# Altium PCB LedLampDriver_4_layer.PcbDoc
Units mm, origin at the board's own origin, x right, y up, seen from the top; angles counter-clockwise.
Board outline 20 x 15 mm, 4 copper layers (Top Layer, Layer 1, Layer 2, Bottom Layer), stack 0.608 mm thick; 26 components, 10 nets, 57 pads, 75 vias.
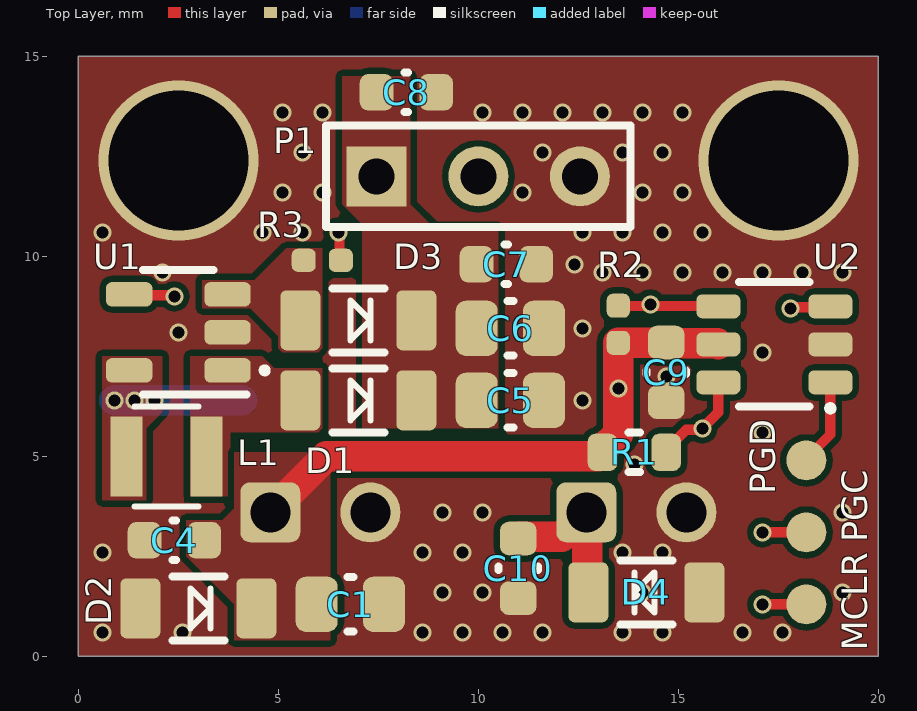
[diagram p0: Top Layer view]
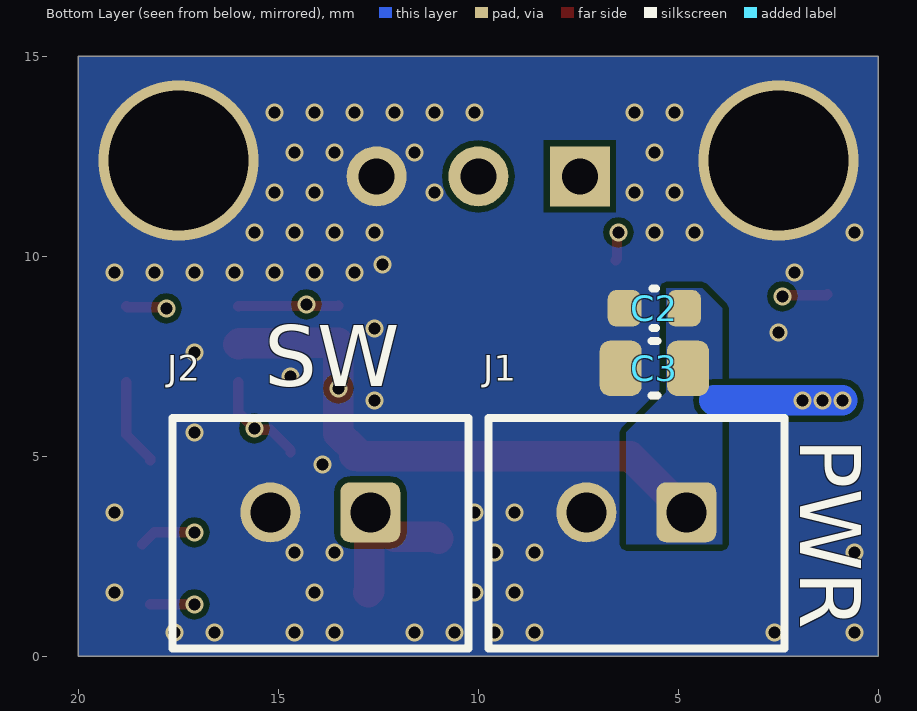
[diagram p1: Bottom Layer view, seen from below]
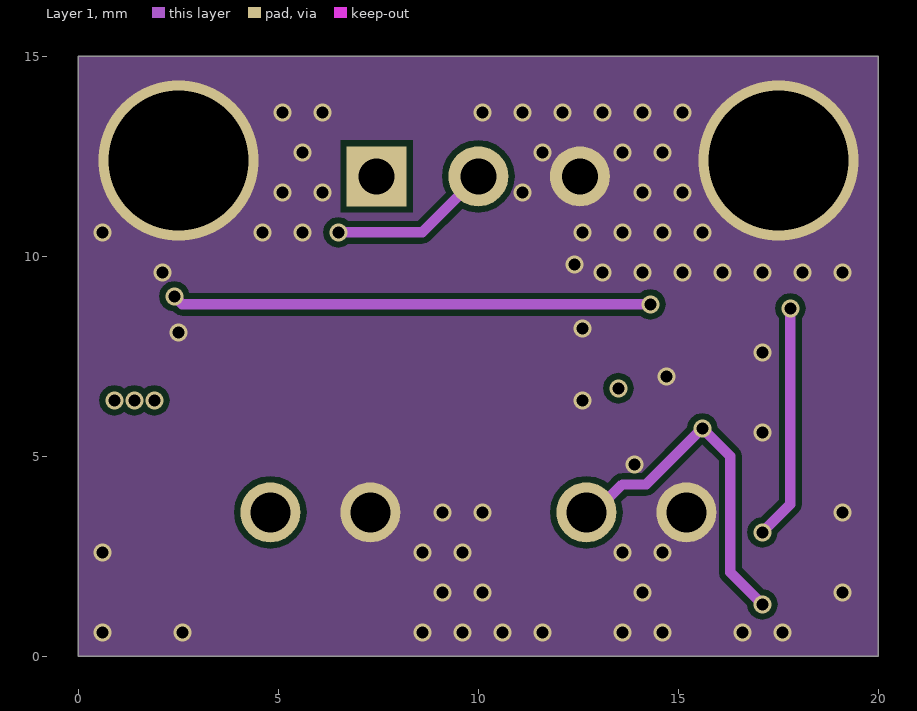
[diagram p2: Layer 1]
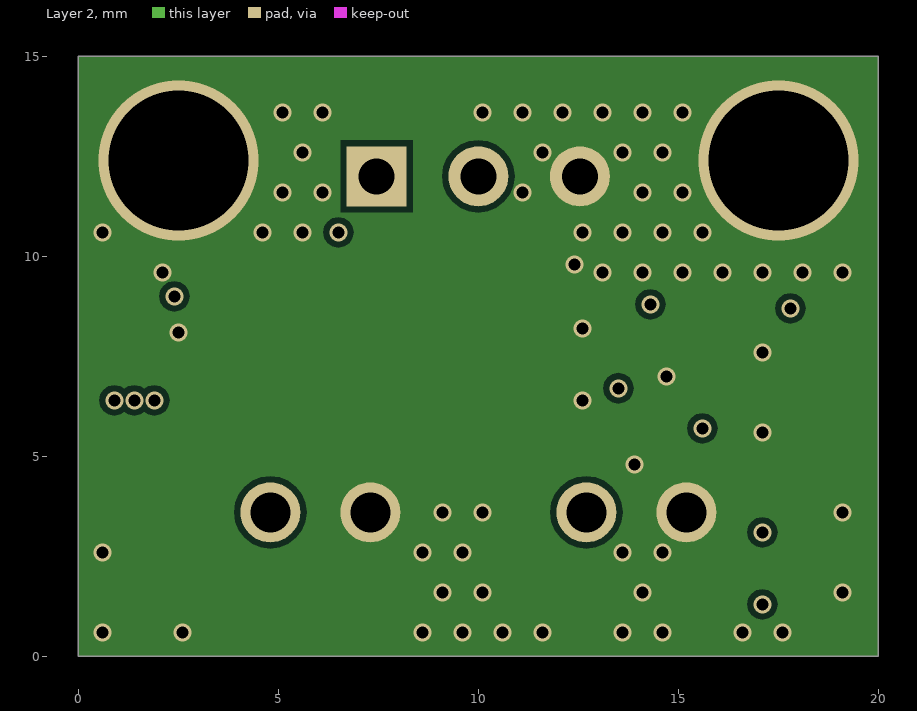
[diagram p3: Layer 2]
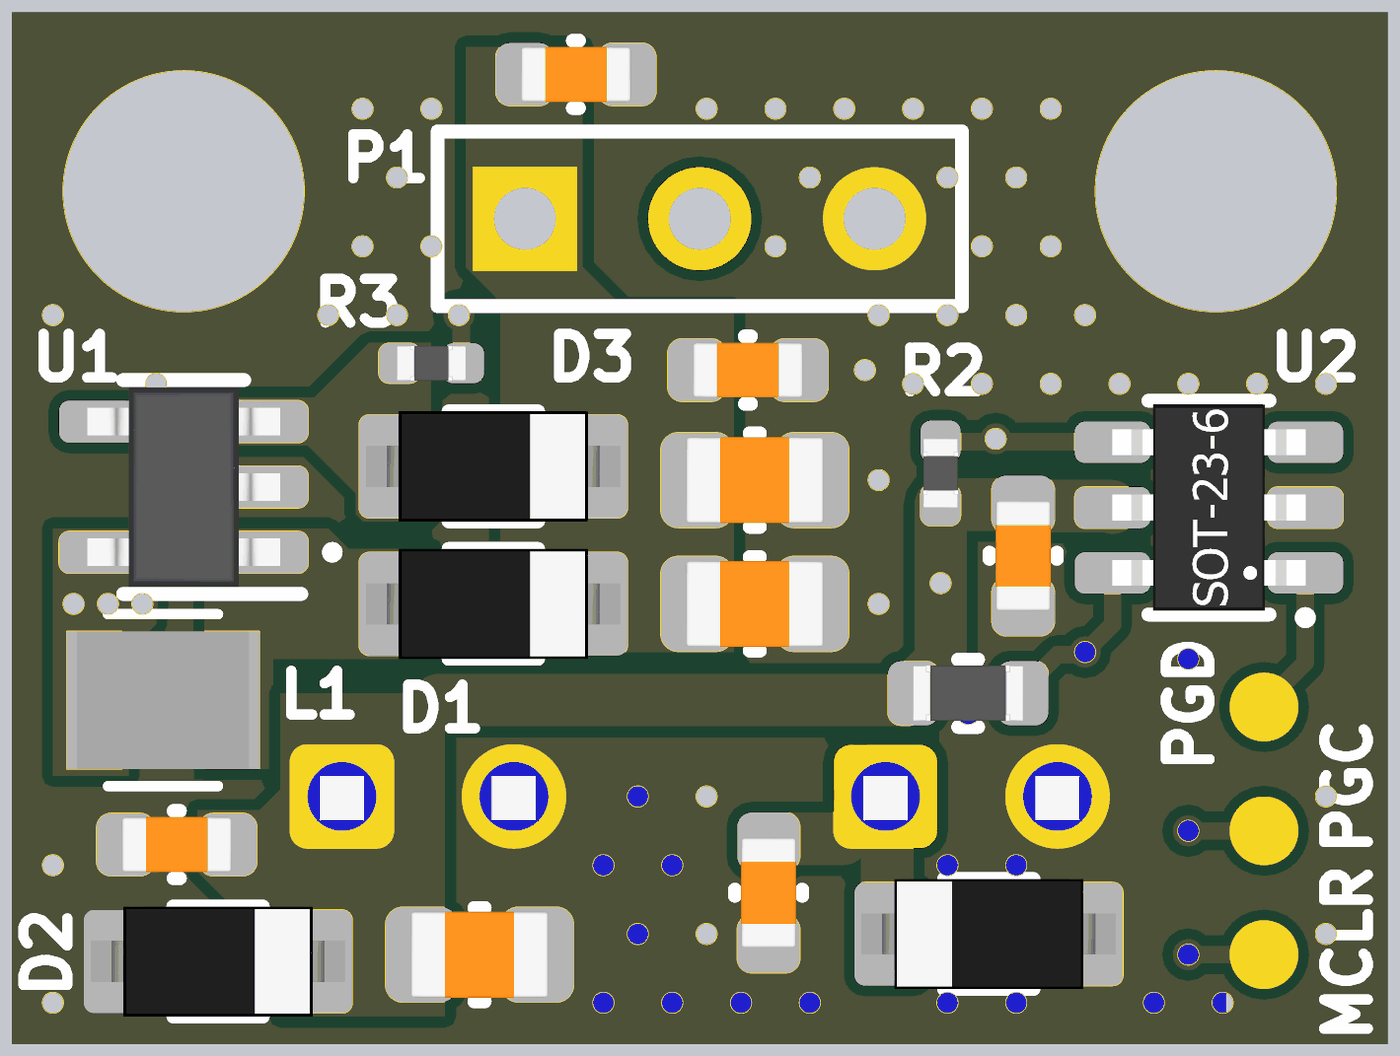
[diagram p4: 3D render of the assembled board from above, using the file's embedded part models]
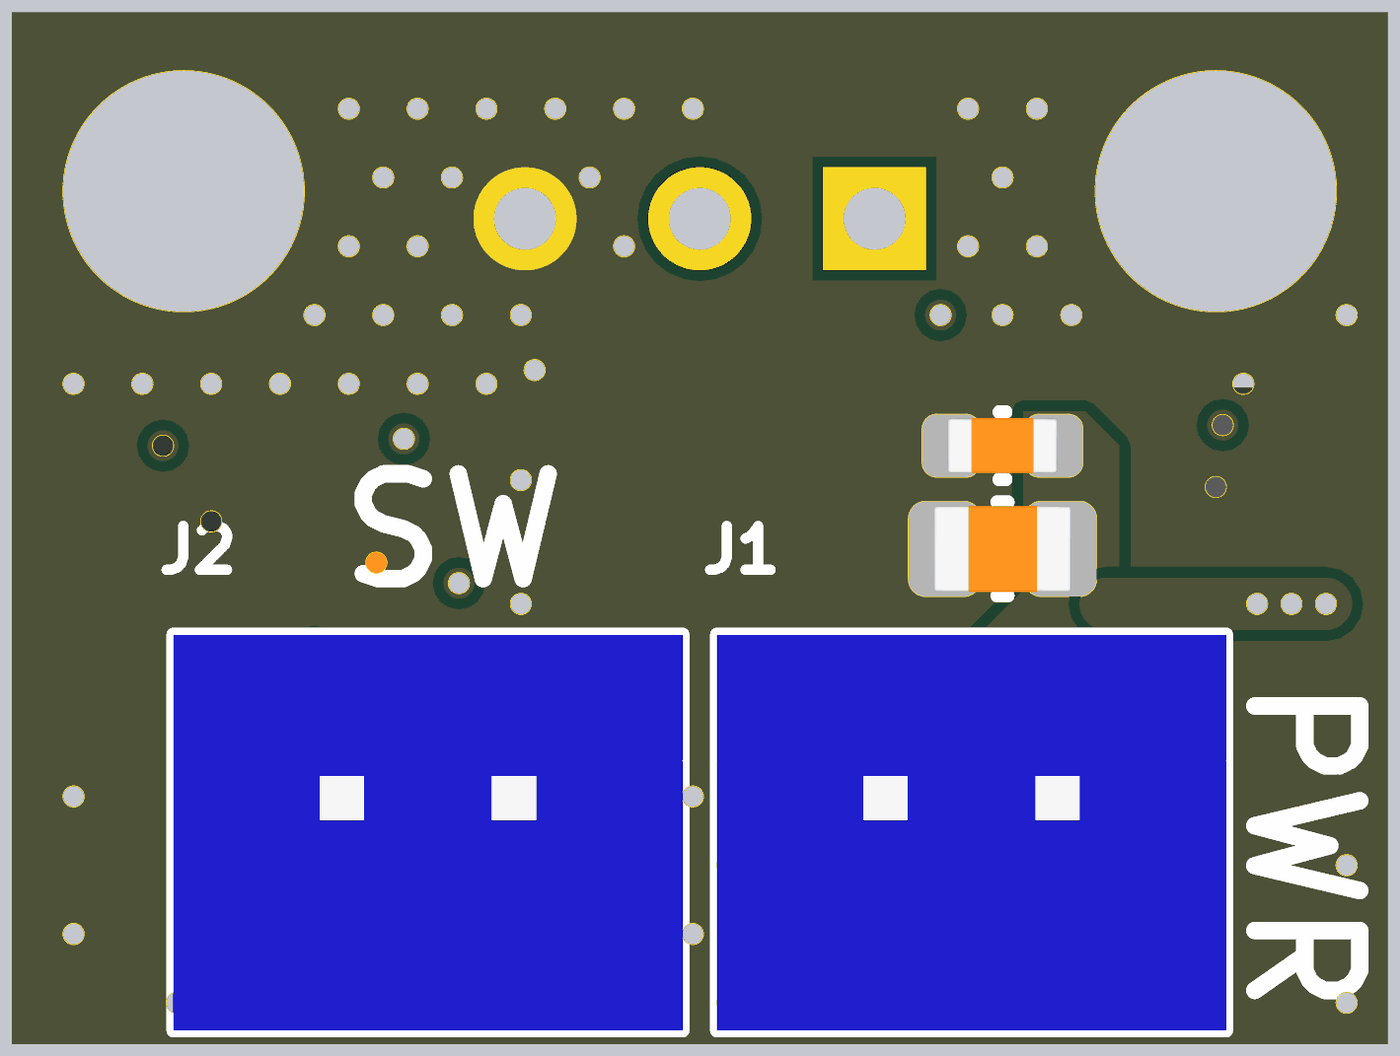
[diagram p5: 3D render of the assembled board from below, using the file's embedded part models]

## Layer stack, top to bottom
Top Solder: solder mask 0.0102, Solder Resist, Dk 3.5
Top Layer: signal copper 0.0356
Dielectric 2: prepreg 0.2, PP-006, Dk 4.1
Layer 1: signal copper 0.0178
Dielectric 1: core 0.1016, Core-009, Dk 4.5
Layer 2: signal copper 0.0178
Dielectric 3: prepreg 0.2, PP-006, Dk 4.1
Bottom Layer: signal copper 0.0356
Bottom Solder: solder mask 0.0102, Solder Resist, Dk 3.5

## Board outline
0,0 0,15 20,15 20,0

## Design rules (kind name [scope] priority, off if disabled: settings)
Clearance [All] p1: gap=0.15 ignorepadtopadclearanceinfootprint=FALSE except(0: Arc-Hole Track-Hole SMDPad-Hole THPad-Hole Via-Hole Fill-Hole Poly-Hole Region-Hole Text-Hole; 0.127: Arc-Arc Arc-Track Arc-SMDPad Track-Track Track-SMDPad SMDPad-SMDPad)
HoleSize [All] p1: absolutevalues=TRUE maxlimit=2.54 minlimit=0.3 maxpercent=80.000 minpercent=20.000
HoleToHoleClearance [All] p1: gap=0.127 allowstackedmicrovias=TRUE
MinimumSolderMaskSliver [All] p1: minsoldermaskwidth=0.127
PlaneConnect [All] p1: planeconnectstyle=Direct reliefexpansion=0.508 reliefentries=4 reliefconductorwidth=0.254 reliefairgap=0.254
PolygonConnect [All] p1: connectstyle=Direct reliefconductorwidth=0.254 reliefentries=4 polygonreliefangle="90 Angle" airgapwidth=0.254
RoutingVias [All] p1: holewidth=0.4 width=0.6 viastyle="Through Hole" minholewidth=0.3 minwidth=0.55 maxholewidth=1 maxwidth=0.1
SilkToSilkClearance [All] p1: silktosilkclearance=0.152
SilkToSolderMaskClearance [IsPad] p1: minsilkscreentomaskgap=0.152 clearancetoexposedcopper=TRUE
SolderMaskExpansion [All] p1: expansion=0.01 istentingtop=FALSE
Width [All] p1: maxlimit=3 minlimit=0.203 preferedwidth=0.254 midlayer1_minwidth=0.254 midlayer1_maxwidth=0.254 midlayer2_minwidth=0.254 midlayer2_maxwidth=0.254 bottomlayer_maxwidth=0.762 minimp=50.000000 maximp=50.000000 favimp=50.000000
24 further rules are at their usual default settings.

## Components (designator, comment, footprint, x,y, rotation, side; value= is the part's Value field where it differs from the comment)
C1 "10u" C0805_N 6.8,1.3 r0 top
C2 "10u" C0603_N#1 5.6,8.7 r0 bottom
C3 "100n" C0805_N 5.6,7.2 r0 bottom
C4 "100n" C0603_N#1 2.4,2.9 r180 top
C5 "10u" C0805_N 10.8,6.4 r0 top
C6 "10u" C0805_N 10.8,8.2 r0 top
C7 "1u" C0603_N#1 10.7,9.8 r0 top
C8 "100n" C0603_N#1 8.2,14.1 r0 top
C9 "100n" C0603_N#1 14.7,7.1 r270 top
C10 "100n" C0603_N#2 11,2.2 r270 top
D1 "DIODE" SOD-123#1 7,6.4 r180 top
D2 "DIODE_ZENER" SOD-123#2 3,1.2 r180 top
D3 "DIODE_ZENER" SOD-123#1 7,8.4 r180 top
D4 "DIODE_ZENER" SOD-123#1 14.2,1.6 r0 top
J1 "" B2B-XH-A 4.8,3.6 r0 bottom
J2 "" B2B-XH-A 12.7,3.6 r0 bottom
L1 "4,7u" IND_2520 2.2,5 r0 top
MCLR "TP" TP_1MM 18.2,1.3 r0 top
P1 "Header 3" HDR1X3 7.46,12 r0 top
PGC "TP" TP_1MM 18.2,3.1 r0 top
PGD "TP" TP_1MM 18.2,4.9 r0 top
R1 "10k" R0603_N 13.9,5.1 r0 top
R2 "DNP" R0402_N 13.5,8.3 r90 top
R3 "1k" R0402_N 6.1,9.9 r0 top
U1 "MIC2287C" SOT23-5 2.5,8.1 r90 top
U2 "PIC10F200" SOT23-6 17.4,7.8 r90 top

## Footprints (in the part's own frame and the unit in brackets; to place one, negate y for a bottom-side part, rotate by r counter-clockwise, add the part's x,y. Pads: shape width x height; smd on the part's side, far side on the other; paste and mask are expansions set on the pad)
B2B-XH-A [mm] "Header, Vertical, 2.50 mm pitch; 0.70 mm lead width, 5 pins, 1 row, 5 pins per row, 14.90 mm L X 5.75 mm W X 7.00 mm H body"
  rrect33% 1.5x1.5 / inner round 1.5 / far side rrect33% 1.5x1.5 hole 1 paste-1.5: 1(0,0)
  round 1.5 hole 1 paste-1.5: 2(2.5,0)
  silkscreen extent -2.45,-2.35 4.95,3.4, body extent -2.45,-2.35 4.95,3.4, height 7.05
C0603_N#1 [mm] "Capacitor, Chip; 1.60 mm L X 0.80 mm W X 0.87 mm H body"
  rrect50% 0.84x0.91 smd: 1(-0.745,0) 2(0.745,0)
  silkscreen extent -0.05,-0.49 0.05,0.49, body extent -0.8,-0.4 0.8,0.4, height 0.87
C0603_N#2 [mm] "Capacitor, Chip; 1.60 mm L X 0.80 mm W X 0.87 mm H body"
  rrect50% 0.84x0.91 smd: 1(-0.745,0)
  rrect50% 0.84x0.91 smd mask+0.01: 2(0.745,0)
  silkscreen extent -0.05,-0.49 0.05,0.49, body extent -0.8,-0.4 0.8,0.4, height 0.87
C0805_N [mm] "Capacitor, Chip; 2.00 mm L X 1.25 mm W X 1.35 mm H body"
  rrect48% 1.05x1.38 smd: 1(-0.84,0) 2(0.84,0)
  silkscreen extent -0.08,-0.68 0.08,0.68, body extent -1,-0.63 1,0.63, height 1.35
HDR1X3 [mm] "Connector; Header; 3 Position"
  rect 1.5x1.5 hole 0.9: 1(0,0)
  round 1.5 hole 0.9: 2(2.54,0)
  round 1.5 hole 0.9 mask+0: 3(5.08,0)
  silkscreen extent -1.27,-1.27 6.35,1.27
IND_2520 [mm] "2.5 mm x 2.0 mm"
  rect 0.8x2 smd: 1(-1,0) 2(1,0)
  silkscreen extent -0.8,-1.25 0.8,1.25, body extent -1.25,-1 1.25,1, height 1
R0402_N [mm] "Resistor, Chip; 1.00 mm L X 0.50 mm W X 0.40 mm H body"
  rrect52% 0.6x0.58 smd: 1(-0.465,0) 2(0.465,0)
  body extent -0.5,-0.25 0.5,0.25, height 0.4
R0603_N [mm] "Resistor, Chip; 1.60 mm L X 0.80 mm W X 0.55 mm H body"
  rrect51% 0.74x0.93 smd: 1(-0.795,0) 2(0.795,0)
  silkscreen extent -0.15,-0.49 0.15,0.49, body extent -0.8,-0.4 0.8,0.4, height 0.55
SOD-123#1 [mm] "SOD-123"
  rrect30% 1x1.5 smd: A(1.45,0) C(-1.45,0)
  silkscreen extent -0.65,-0.8 0.65,0.8, body extent -1.85,-0.8 1.85,0.8, height 1.27
SOD-123#2 [mm] "SOD-123"
  rrect30% 1x1.5 smd mask+0: A(1.45,0)
  rrect30% 1x1.5 smd: C(-1.45,0)
  silkscreen extent -0.65,-0.8 0.65,0.8, body extent -1.85,-0.8 1.85,0.8, height 1.27
SOT23-5 [mm] "Small Outline Transistor (SOT23), 0.95 mm pitch; 5 pin, 2.90 mm L X 1.60 mm W X 1.45 mm H body"
  rrect49% 0.61x1.16 smd: 1(-0.95,-1.23) 2(0,-1.23) 3(0.95,-1.23) 4(0.95,1.23) 5(-0.95,1.23)
  silkscreen extent -1.56,-2.24 1.56,0.88, body extent -1.45,-1.4 1.45,1.4, height 1.45
SOT23-6 [mm] "Small Outline Transistor (SOT23), 0.95 mm pitch; 6 pin"
  rrect49% 0.6x1.1 smd: 1(-0.95,-1.4) 2(0,-1.4) 3(0.95,-1.4) 4(0.95,1.4) 5(0,1.4) 6(-0.95,1.4)
  silkscreen extent -1.68,-1.48 1.56,0.88, body extent -1.5,-1.4 1.5,1.4, height 0.86
TP_1MM [mm]
  round 1 smd paste-100 mask+0: 1(0,0)

## Part data
C1 C2 C3 C4 C5 C6 C7 C8 C9 C10: library part CAP, RevS="$Rev:: 58        $"
J1 J2: library part PINHDR_2X1, "Socket", ComponentLink1Description=Manufacturer, ComponentLink1URL=http://www.we-online.de, ComponentLink2Description=Datasheet, ComponentLink2URL=http://katalog.we-online.de/em/datasheet/691412320002.pdf
L1: library part IND, "Inductor"
P1: "Header, 3-Pin", LatestRevisionDate=17-Jul-2002, LatestRevisionNote="Re-released for DXP Platform.", Publisher="Altium Limited"
R1 R2 R3: library part RES
U1: "1.2MHz PWM White LED Driver with OVP in / 2mm × 2mm MLF™ and Thin SOT-23"
U2: "6-Pin, 8-Bit Flash MCU"

## Via types
v1: diameter 0.45, hole 0.3, Top Layer to Bottom Layer, tented both sides, 73 vias
v2: diameter 4, hole 3.5, Top Layer to Bottom Layer, tented both sides, 2 vias

## Nets (pads, with @x,y where several pads share a name; then routed paths per layer and width w, separated by ;. In a path a pad name is that pad's centre, name@x,y a point inside that pad or via, vN(x,y) a via of type N, cw(c..) or ccw(c..) an arc to the next point about the centre after c; other vN are vias at no path point)
CTRL: R2.2 U1.4 U2.4 | length 15.6
  Top Layer w0.254: U1.4 1.295,9.025 2.375,9.025 v1(2.4,9) ; R2.2 13.508,8.758 15.993,8.758 U2.4
  Layer 1 w0.254: v1(2.4,9) 2.6,8.8 v1(14.3,8.8)
FB: P1.2 R3.2 | length 4.8
  Top Layer w0.254: v1(6.5,10.6) 6.533,10.567 6.533,9.932 R3.2
  Layer 1 w0.254: v1(6.5,10.6) 8.6,10.6 P1.2
GND: C1.2 C2.2 C3.2 C4.2 C5.2 C6.2 C7.2 C8.2 C9.2 C10.2 D2.A D4.A J1.2 J2.2 P1.3 U1.2 U2.2
  other v1: 0.6,0.6 2.6,0.6 8.6,0.6 9.6,0.6 10.6,0.6 11.6,0.6 13.6,0.6 14.6,0.6 16.6,0.6 17.6,0.6 9.1,1.6 10.1,1.6 14.1,1.6 19.1,1.6 0.6,2.6 8.6,2.6 9.6,2.6 13.6,2.6 14.6,2.6 9.1,3.6 10.1,3.6 19.1,3.6 13.9,4.8 17.1,5.6 12.6,6.4 14.7,7 17.1,7.6 2.5,8.1 12.6,8.2 2.1,9.6 13.1,9.6 14.1,9.6 15.1,9.6 16.1,9.6 17.1,9.6 18.1,9.6 19.1,9.6 12.4,9.8 0.6,10.6 4.6,10.6 5.6,10.6 12.6,10.6 13.6,10.6 14.6,10.6 15.6,10.6 5.1,11.6 6.1,11.6 11.1,11.6 14.1,11.6 15.1,11.6 5.6,12.6 11.6,12.6 13.6,12.6 14.6,12.6 5.1,13.6 6.1,13.6 10.1,13.6 11.1,13.6 12.1,13.6 13.1,13.6 14.1,13.6 15.1,13.6
  other v2: 2.5,12.4 17.5,12.4
NetD1_A: D1.A L1.2 U1.1
NetD3_A: D3.A R3.1 U1.3
NetPGC_1: PGC.1 U2.3 | length 8.3
  Top Layer w0.254: v1(17.1,3.1) 18.1,3.1 PGC.1@18.4,2.8 ; v1(17.8,8.7) 17.825,8.725 18.775,8.725 U2.3
  Layer 1 w0.254: v1(17.1,3.1) 17.8,3.8 v1(17.8,8.7)
NetPGD_1: PGD.1 U2.1 | length 2.2
  Top Layer w0.254: PGD.1 18.2,4.946 18.8,5.546 U2.1
SW: C10.1 D4.C J2.1 MCLR.1 R1.2 U2.6 | length 16.6
  Top Layer w0.254: J2.1 J2.1@12.882,3.782 ; R1.2 14.695,5.162 15.196,5.662 15.562,5.662 v1(15.6,5.7) 16,6.1 U2.6 ; v1(17.1,1.3) MCLR.1
  Top Layer w0.762: C10.1 11.039,2.984 12.084,2.984 J2.1 12.725,3.575 12.725,1.625 D4.C
  Layer 1 w0.254: J2.1 12.903,3.6 13.601,4.298 14.198,4.298 v1(15.6,5.7) 16.3,5 16.3,2.1 v1(17.1,1.3)
Vin: C1.1 C2.1 C3.1 C4.1 C9.1 D2.C J1.1 L1.1 R1.1 R2.1 U1.5 U2.5 | length 17.6
  Top Layer w0.762: J1.1 6.2,5 13.005,5 13.021,5.016 13.094,5.016 13.105,5.027 R1.1 13.105,5.173 13.5,5.568 v1(13.5,6.702) R2.1 13.51,7.845 C9.1 14.723,7.822 15.978,7.822 U2.5
  Bottom Layer w0.762: v1(0.9,6.4) v1(1.4,6.4) v1(1.9,6.4) 4.1,6.4
Vout: C5.1 C6.1 C7.1 C8.1 D1.C D3.C P1.1

## Polygon pours and split planes (outlines as drawn)
GND on Top Layer "Layer 1-No Net" (solid, pour order 9): 0,0 0,15 20,15 20,0
NetD3_A on Top Layer "NETD3_A_L01_P005" (solid, pour order 5): 3.1,8.7 4.3,8.7 5,8 5,7.7 5.1,7.6 6,7.6 6.1,7.7 6.1,10.2 5.2,10.2 4.4,9.4 3.1,9.4
Vin on Top Layer "VIN_L01_P004" (solid, pour order 4): 0.6,7.5 0.6,3.9 1.7,3.9 1.7,5.7 2.1,6.1 2.1,7.5
NetD1_A on Top Layer "NETD1_A_L01_P003" (solid, pour order 3): 2.8,4 2.8,7.5 4.6,7.5 4.9,7.2 6.1,7.2 6.1,5.7 6,5.6 3.8,5.6 3.8,4
Vin on Top Layer "VIN_L01_P001" (solid, pour order 1): 6.3,0.4 6.3,5.1 3.9,5.1 3.9,3.7 3.6,3.4 2.7,3.4 2.7,2.5 3.9,1.3 3.9,0.4
Vout on Top Layer "VOUT_L01_P000" (solid, pour order 0): 10.5,5.7 7.1,5.7 7.1,10.8 6.6,11.3 6.6,14.5 8.3,14.5 8.3,11.3 8.9,10.7 10.5,10.7
GND on Bottom Layer "Top Layer-No Net" (solid, pour order 6): 0,0 0,15 20,15 20,0
Vin on Bottom Layer "VIN_L04_P002" (solid, pour order 2): 5.3,9.2 5.3,6.6 6.3,5.6 6.3,2.8 3.9,2.8 3.9,8.7 4.4,9.2
GND on Layer 2 "Bottom Layer-No Net" (solid, pour order 7): 0,0 0,15 20,15 20,0
GND on Layer 1 "Layer 2-No Net" (solid, pour order 8): 0,0 0,15 20,15 20,0

## Silkscreen, mask and mechanical layers (free items; w line width, h text height)
Bottom Overlay:
  text "SW" at 15.346,6.754 h1.52
  text "PWR" at 1.946,5.446 h1.52 r90
Mechanical 1:
  the board outline again, w0.254